# Altium PCB VibrationMonitorSPT.PcbDoc
Units mil, origin at the board's own origin, x right, y up, seen from the top; angles counter-clockwise.
Board outline 2130 x 1361 mil, 2 copper layers (Top Layer, Bottom Layer); 37 components, 30 nets, 168 pads, 22 vias.
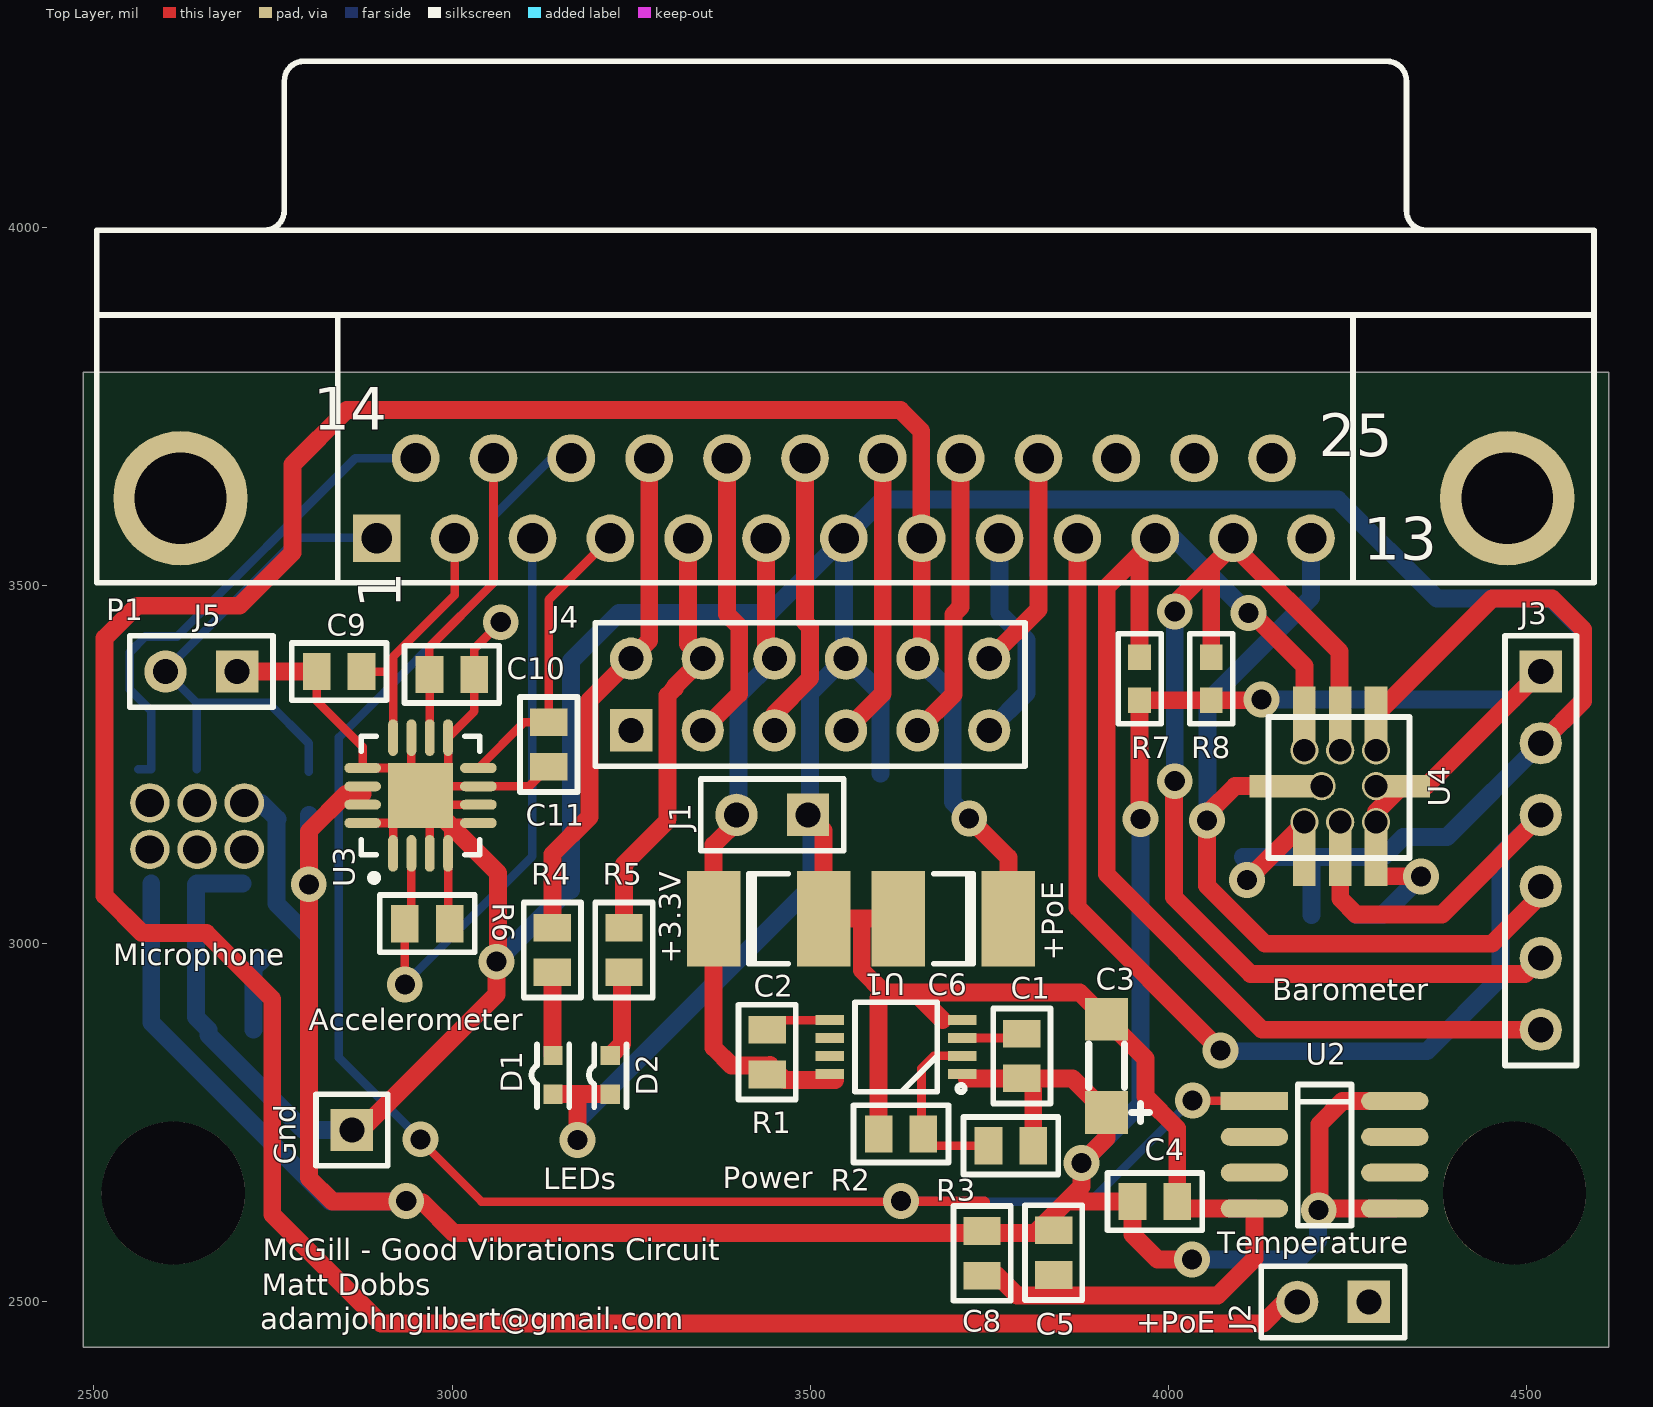
[diagram p0: Top Layer view]
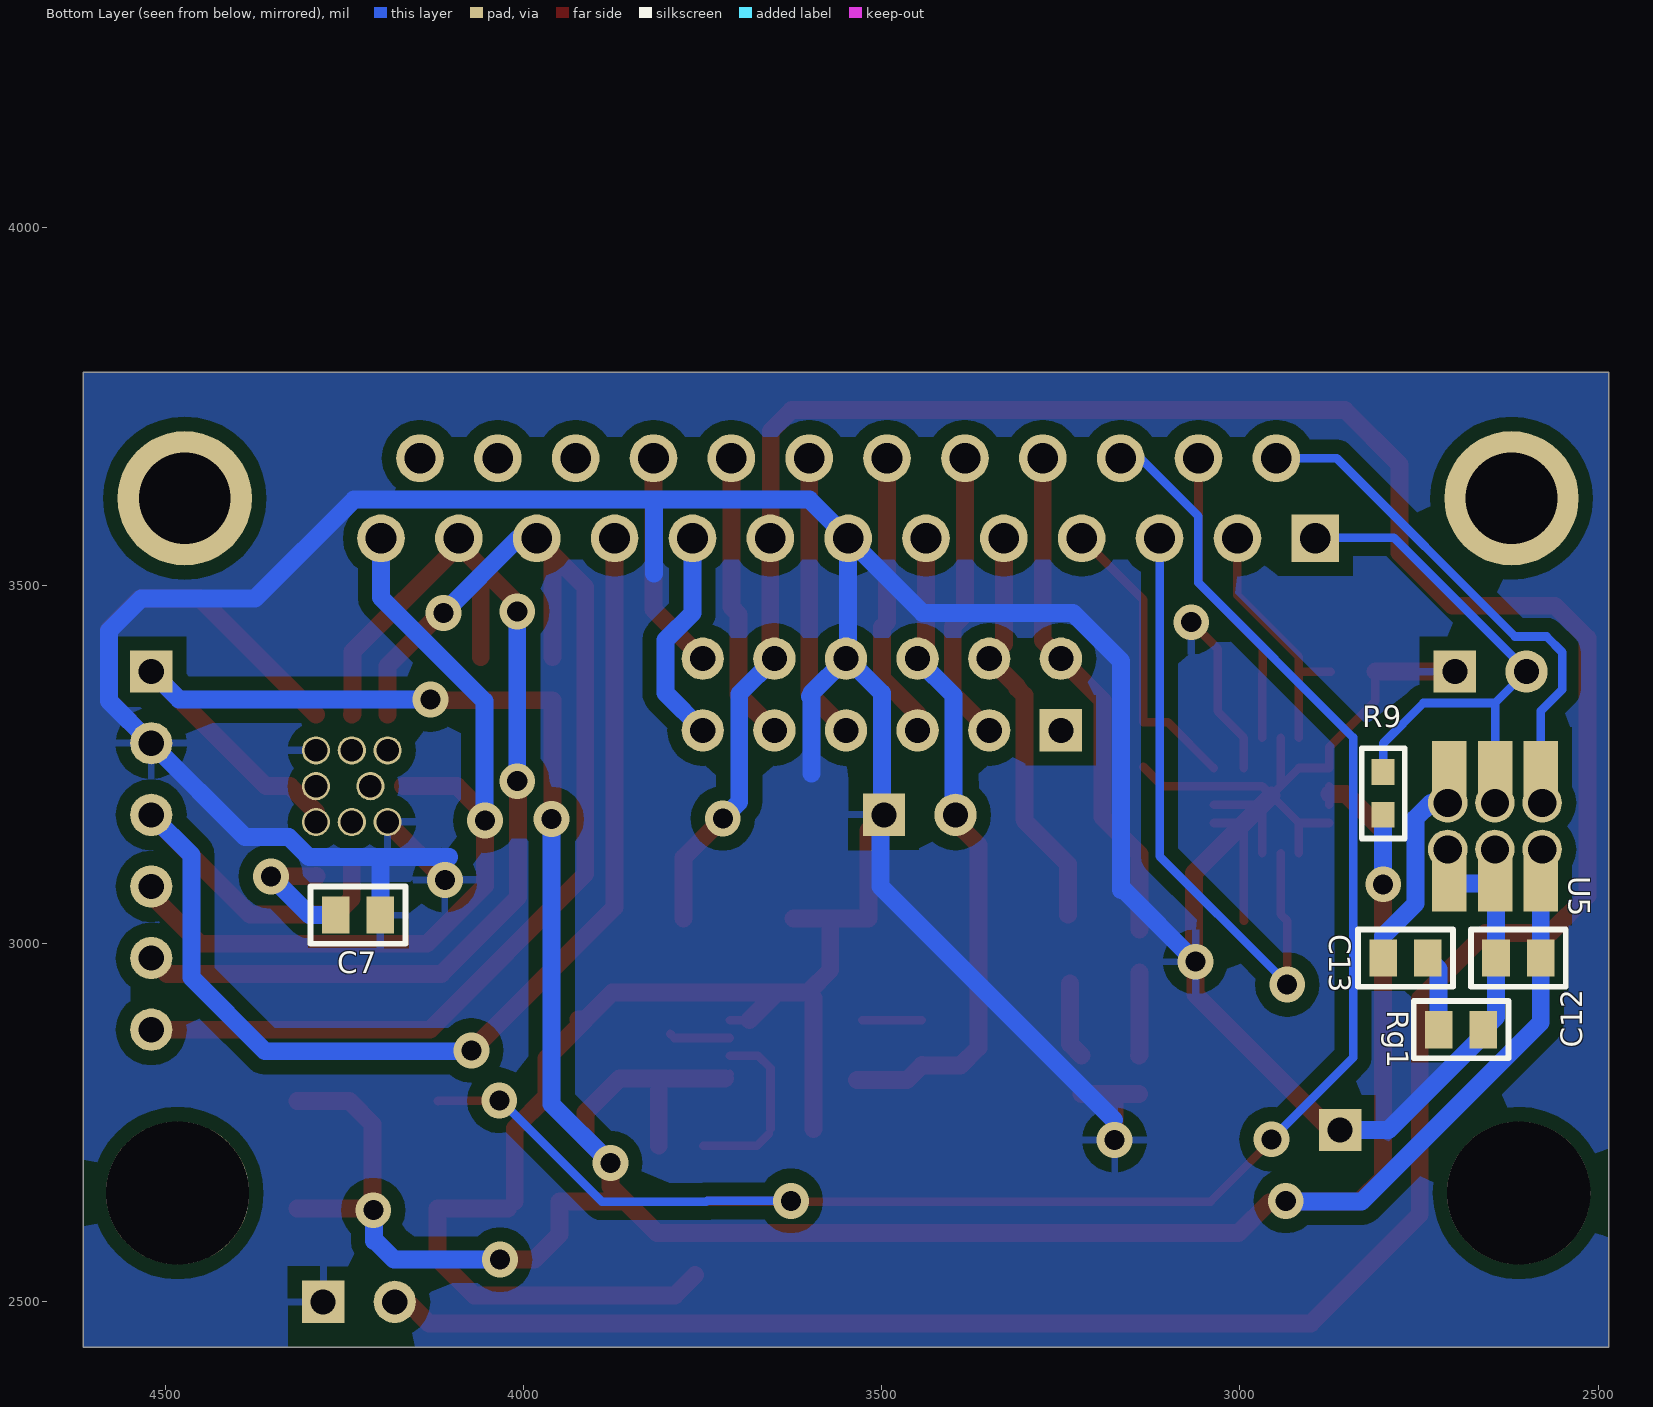
[diagram p1: Bottom Layer view, seen from below]

## Layer stack, top to bottom
Top Layer: signal copper 1.4
Dielectric: dielectric 12.6, FR-4, Dk 4.8
Bottom Layer: signal copper 1.4

## Board outline
2485,3798 4615,3798 4615,2437 2485,2437 2485,3798

## Design rules (kind name [scope] priority, off if disabled: settings)
Clearance Clearance_1 [(IsRegion)] p1: gap=20
Clearance [All] p2: gap=5
HoleSize [All] p1: absolutevalues=TRUE maxlimit=1000 minlimit=1 maxpercent=80.000 minpercent=20.000
MinimumSolderMaskSliver [All] p1: minsoldermaskwidth=0
PolygonConnect [All] p1: connectstyle=Relief reliefconductorwidth=10 reliefentries=4 polygonreliefangle="90 Angle"
RoomDefinition VibrationMonitorSPT [InComponentClass('VibrationMonitorSPT')] p1: confinementstyle=ConfineIn formatcopy=TRUE lockcomponents=FALSE outline 2402,2370 4682,2370 4682,4321 2402,4321
RoomDefinition P1 [InComponentClass('P1')] p2: confinementstyle=ConfineIn formatcopy=TRUE lockcomponents=FALSE outline 3313,2680 3989,2680 3989,3116 3313,3116
RoutingVias [All] p1: holewidth=28 width=50 viastyle="Through Hole" minholewidth=28 minwidth=50 maxholewidth=28 maxwidth=50
SilkToSilkClearance [All] p1: silktosilkclearance=0
SilkscreenOverComponentPads [All] p1: minsilkscreentomaskgap=0
SolderMaskExpansion [All] p1: expansion=4
Width [All] p1: maxlimit=100 minlimit=12 preferedwidth=12
24 further rules are at their usual default settings.

## Classes and differential pairs
component class VibrationMonitorSPT: C4 C5 C6 C7 C8 C9 C10 C11 C12 C13 D1 D2 Gnd J1 J2 J3 J4 J5 P1 R3 R4 R5 R6 R7 R8 R9 Rg1 U2 U3 U4 U5
component class P1: C1 C2 C3 R1 R2 U1

## Components (designator, comment, footprint, x,y, rotation, side; value= is the part's Value field where it differs from the comment)
C1 "0.1uF" 0805 3795.48,2874.48 r270 top
C2 "33uF x 16V" CC4532-1812 3442,3035 r0 top
C3 "10u A3216 10V LO ESR" TANTA 3914,2765 r90 top
C4 "0.1uF" 0805 3950,2640 r0 top
C5 "10uF" 0805 3840,2600 r270 top
C6 "33uF x 16V" CC4532-1812 3700,3035 r180 top
C7 "0.1uF" 0805 4200,3040 r0 bottom
C8 "0.1uF" 0805 3740,2599 r270 top
C9 "4.7nF" 0805 2811,3380 r0 top
C10 "4.7nF" 0805 3031,3376 r180 top
C11 "4.7nF" 0805 3135,3247 r90 top
C12 "0.1uF" 0805 2580,2980 r0 bottom
C13 "10uF" 0805 2800,2980 r180 bottom
D1 "LTST-S270KSKT, Yellow" LED-S270KGKT 3141,2790 r90 top
D2 "LTST-S270KSKT, Yellow" LED-S270KGKT 3221,2790 r90 top
Gnd "Header1" HDR1 2860,2740 r90 top
J1 "Header2" HDR1X2 3497,3180 r180 top
J2 "Header2" HDR1X2 4280,2500 r180 top
J3 "Header 6" HDR1X6 4520,3380 r270 top
J4 "6x2 header" HDR2X6 3250,3298 r0 top
J5 "Header2" HDR1X2 2700,3380 r180 top
P1 "CONN, DB25f R/A, 0.318\"" DSUB1.385-2H25A 3547,3996 r0 top
R1 "Res0805" 0805 3440,2880 r270 top
R2 "Res0805" 0805 3595.48,2734.48 r0 top
R3 "Res0603" 0805 3749,2718 r0 top
R4 "Res0805" 0805 3140,2960 r90 top
R5 "Res0805" 0805 3240,2960 r90 top
R6 "Res0805" 0805 2934,3028 r0 top
R7 "Res0805" 0603 3960,3340 r90 top
R8 "Res0805" 0603 4060,3340 r90 top
R9 "Res0805" 0603 2800,3180 r90 bottom
Rg1 "Res0805" 0805 2660,2880 r0 bottom
U1 "LT1962EMS8" MSOP-8 3712.48,2818.48 r180 top
U2 "TMP36FS - TempSensor" SO8/L200 4120,2780 r270 top
U3 "ADXL335BCPZ. - Accelerometer" ADXL335 2956,3207 r90 top
U4 "BMP085 - Pressure Sensor" BMP085 4140,3120 r90 top
U5 "SPM0407HE3H-SB - Microphone" SPM0407HE3H-SB 2580,3240 r270 bottom

## Footprints (in the part's own frame and the unit in brackets; to place one, negate y for a bottom-side part, rotate by r counter-clockwise, add the part's x,y. Pads: shape width x height; smd on the part's side, far side on the other; paste and mask are expansions set on the pad)
0603 [mil]
  rect 36x32 smd: 1(0,0) 2(60,0)
  silkscreen extent -33,-30 93,30
0805 [mil]
  rect 38.5x52 smd: 1(0,0) 2(62.5,0)
  silkscreen extent -35,-40 98,40
ADXL335 [mm] "QFN, 16-Leads, Body 4.2x4.2mm (max), Pitch 0.65mm, IPC Low Density"
  oval 1.3x0.35 smd: 1(-2.052,0.975) 2(-2.052,0.325) 3(-2.052,-0.325) 4(-2.052,-0.975) 9(2.052,-0.975) 10(2.052,-0.325) 11(2.052,0.325) 12(2.052,0.975)
  oval 0.35x1.3 smd: 5(-0.975,-2.052) 6(-0.325,-2.052) 7(0.325,-2.052) 8(0.975,-2.052) 13(0.975,2.052) 14(0.325,2.052) 15(-0.325,2.052) 16(-0.975,2.052)
  rect 2.3x2.3 smd: 17(0,0)
  silkscreen extent -3.04,-2.1 2.1,2.1
BMP085 [mm] "Pressure sensor"
  rect 2x0.8 smd: 1(0,-1.27) 2(0,-2.54) 3(-0.007,-3.81) 5(5.08,-3.81) 6(5.08,-2.54) 7(5.08,-1.27)
  round 1 hole 0.8: 1(1.27,-1.27) 2(1.27,-2.54) 3(1.27,-3.81) 4(2.54,-3.81) 5(3.81,-3.81) 6(3.81,-2.54) 7(3.81,-1.27) 8(2.54,-1.88)
  round 0.5 on Top Overlay: 2(-0.737,-0.229)
  rect 0.8x2 smd: 4(2.54,-4.729)
  rect 0.8x2.8 smd: 8(2.54,-0.729)
  silkscreen extent -0.01,-5 4.99,0
CC4532-1812 [mm]
  rect 1.9x3.4 smd: 1(-1.95,0) 2(1.95,0)
  silkscreen extent -0.7,-1.6 0.7,1.6
DSUB1.385-2H25A [mm] "Connector; D Subminiature; 25 Position; Right Angle; Pitch 1.385 mm"
  rect 1.69x1.69 hole 1.09: 1(-16.566,-10.92)
  round 1.69 hole 1.09: 2(-13.805,-10.92) 3(-11.044,-10.92) 4(-8.283,-10.92) 5(-5.522,-10.92) 6(-2.761,-10.92) 7(0,-10.92) 8(2.761,-10.92) 9(5.522,-10.92) 10(8.283,-10.92) 11(11.044,-10.92) 12(13.805,-10.92) 13(16.566,-10.92) 14(-15.185,-8.08) 15(-12.424,-8.08) 16(-9.663,-8.08) 17(-6.902,-8.08) 18(-4.141,-8.08) 19(-1.38,-8.08) 20(1.381,-8.08) 21(4.142,-8.08) 22(6.903,-8.08) 23(9.664,-8.08) 24(12.425,-8.08) 25(15.186,-8.08)
  round 4.76 hole 3.26: 26(-23.526,-9.5) 27(23.526,-9.5)
  silkscreen extent -26.5,-12.5 26.6,6
HDR1 [mm]
  rect 1.5x1.5 hole 0.889: 1(0,0)
  silkscreen extent -1.27,-1.27 1.27,1.27
HDR1X2 [mm]
  rect 1.5x1.5 hole 0.889: 1(0,0)
  round 1.5 hole 0.889: 2(2.54,0)
  silkscreen extent -1.27,-1.27 3.81,1.27
HDR1X6 [mm]
  rect 1.5x1.5 hole 0.889: 1(0,0)
  round 1.5 hole 0.889: 2(2.54,0) 3(5.08,0) 4(7.62,0) 5(10.16,0) 6(12.7,0)
  silkscreen extent -1.27,-1.27 13.97,1.27
HDR2X6 [mm]
  rect 1.5x1.5 hole 0.889: 1(0,0)
  round 1.5 hole 0.889: 2(2.54,0) 3(5.08,0) 4(7.62,0) 5(10.16,0) 6(12.7,0) 7(12.7,2.54) 8(10.16,2.54) 9(7.62,2.54) 10(5.08,2.54) 11(2.54,2.54) 12(0,2.54)
  silkscreen extent -1.27,-1.27 13.97,3.81
LED-S270KGKT [mil]
  rect 27x27 smd: 1(54,0) 2(0,0)
  silkscreen extent -18,-22 70,30
MSOP-8 [mil]
  rect 40x14 smd: 1(0,0) 2(0,-25) 3(0,-50) 4(0,-75) 5(185,-75) 6(185,-50) 7(185,-25) 8(185,0)
  silkscreen extent -3,-100 150,26
SO8/L200 [mil]
  rect 25x94 smd: 1(-0.4,0.18)
  oval 25x94 smd: 2(49.6,0.18) 3(99.6,0.18) 4(149.6,0.18) 5(149.6,196.18) 6(99.6,196.18) 7(49.6,196.18) 8(-0.4,196.18)
  silkscreen extent -23,61 174,136
SPM0407HE3H-SB [mm]
  rect 2x1.22 smd: 1(-0.1,0) 2(-0.1,-1.62) 3(-0.1,-3.24) 4(3.956,-3.24) 5(3.956,-1.62) 6(3.956,0)
  round 1.4 hole 1: 1(1.1,0.05) 2(1.1,-1.625) 3(1.1,-3.3) 4(2.75,-3.3) 5(2.75,-1.625) 6(2.75,0.05)
  round 0.5 on Bottom Overlay: 2(-1.53,1.12)
TANTA [mil]
  rect 60x60 smd: 1(-0.4,0.18) 2(129.6,0.18)
  silkscreen extent -13,-60 95,25

## Part data
C1 C4 C5 C7 C8 C9 C10 C11 C12 C13: library part Cap0603, "Capacitor, Ceramic, 0603"
C2 C6: library part "Cap Pol3", "CAP POL C4532X5R1C336M"
C3: library part CAP_POL
D1 D2: library part LED, "LED Side View Yellow 0603"
Gnd: "TestPoint1"
J3: "Header, 0.1\" 6-Pin straight"
J4: library part Header6x2
P1: library part "D Connector 25", "Amp 5747846-4 or ITT DBMG25SJA197"
R1 R2 R4 R5 R6 R7 R8 R9 Rg1: library part Res0603, "Resistor"
R3: "Resistor"
U1: "micropower, low noise, low  dropout regulator"
U2: library part TMP36FS
U3: library part ADXL335
U4: library part BMP085
U5: library part SPM0407HE3H-SB

## Free pads (board coordinates)
  round 200 hole 200: 0(2610.78,2652) 0(4483.22,2652)
  round 450 on Bottom Overlay paste+0: 1(3547,2892)

## Via types
v1: diameter 50, hole 28, Top Layer to Bottom Layer, 22 vias

## Nets (pads, with @x,y where several pads share a name; then routed paths per layer and width w, separated by ;. In a path a pad name is that pad's centre, name@x,y a point inside that pad or via, vN(x,y) a via of type N, cw(c..) or ccw(c..) an arc to the next point about the centre after c; other vN are vias at no path point)
2V8: C1.2 C3.1 C4.1 C5.1 C7.2 C8.1 C12.1 J3.1 R3.2 R7.1 R8.1 R9.1 U1.1 U2.5 U2.8 U3.14 U3.15 U4.3 U4.4 U5.6 | length 5457.2
  Top Layer w12: U3.15 2875.21,3209 U3.14 ; U1.1 U1.1@3718.98,2811.98 ; C1.2 C1.2@3811.5,2795.95
  Top Layer w25: 2875.21,3209 2852,3209 2800,3157 v1(2800,3083) 2792.97,3075.97 2800,3068.94 2800,2673 2833,2640 v1@2922,2640 ; v1@2959,2639 3002,2596 3814,2596 3858,2640 ; U1.1@3718.98,2811.98 C1.2 3866.44,2811.98 C3.1 3913.82,2728.82 v1(3879,2694) 3879,2661 3858,2640 ; R3.2 C1.2@3811.5,2795.95 ; v1@3960,3174 R7.1 R8.1 4129,3340 v1(4130,3341) ; v1(4033,2559) 3985,2559 3950,2594 C4.1 3858,2640 ; v1@4209.4,2630.4 U2.5 ; v1@4211,2632 4211,2748 4243.4,2780.4 U2.8 ; U4.3@4289,3094.74 4289.71,3094.73 v1(4353,3094) ; U4.3@4290,3170 4290,3183.83 4326.17,3220 4360,3220 J3.1
  Bottom Layer w25: U5.6@2580,3084.25 C12.1 2580,2890 2830,2640 v1@2922,2640 ; v1(2800,3083) R9.1 ; v1(3879,2694) 3961,2776 v1(3961,3174) ; v1(4033,2559) 4181,2559 4207,2585 4209,2585 4209,2627 v1(4210,2628) ; v1(4130,3341) 4481,3341 J3.1 ; C7.2 4299,3040 v1(4353,3094)
  other v1: 2936,2641
3V3: C2.1 J1.2 J4.10 P1.6 R1.2 U1.8 | length 948.9
  Top Layer w25: J1.2@3402,3175 3365.23,3138.23 C2.1 3365.23,2854.77 3390,2830 3443.5,2830 3444,2830.5 3464.5,2810 3535,2810 ; P1.6@3444,3560.38 P1.6 3438.3,3409.7 J4.10
  Bottom Layer w25: J1.2@3400,3175 3400,3347 3450,3397 J4.10
ACCTEST: P1.3 R6.1 U3.2 | length 894.4
  Top Layer w12: v1(2934,2943) 2934,2959 2936,2961 2934,2963 2934,3032 2943.2,3041.2 U3.2
  Bottom Layer w12: v1(2934,2943) 2934,2959 2949,2959 3112.2,3122.2 P1.3
ACCXOUT: C9.2 P1.2 U3.12 | length 358.6
  Top Layer w12: C9.2 2916.61,3380 2917.61,3379 ; U3.12 2917.61,3379 ; P1.2@3003.61,3565.96 P1.2 3003.5,3486.5 2917.61,3400.61 2917.61,3379
ACCYOUT: C10.2 P1.15 U3.10 | length 432.4
  Top Layer w12: U3.10 2968.8,3375.7 C10.2 2968,3376.5 2968,3414 3057.85,3503.85 P1.15 P1.15@3054.5,3674.54
ACCZOUT: C11.2 P1.4 U3.8 | length 417.1
  Top Layer w12: U3.8 3100.9,3309.5 C11.2 3135,3480.18 P1.4 P1.4@3221,3565.98
GND: C2.2 C3.2 C4.2 C5.2 C6.2 C7.1 C8.2 C9.1 C10.1 C11.1 C12.2 D1.2 D2.2 Gnd.1 J1.1 J2.1 J3.2 J4.9 J5.1 P1.7 R2.1 R6.2 Rg1.1 U1.4 U2.4 U3.1 U3.3 U3.4 U3.5 U3.6 U3.7 U3.9 U3.11 U3.13 U3.16 U3.17 U4.1 U4.5 U5.4 U5.5 | length 9325
  Top Layer w12: C9.1 2811,3339 2875.21,3274.79 U3.13 2917.61,3245.39 U3.17 ; U3.16 U3.17@2917.61,3168.61 ; U3.1 U3.17@2917.61,3168.61 ; U3.11 2943.2,3219.8 U3.17 ; U3.3 U3.17@2968.8,3194.2 ; R6.2@2994,3032 2994.39,3032.39 U3.4 U3.17@2994.39,3168.61 ; U3.17@2994.39,3245.39 U3.9 3031,3324.4 C10.1 3031,3412 v1(3068,3449) ; U3.5 U3.17@2994.39,3168.61 ; U3.6 U3.17@2968.8,3194.2 ; C11.1 3107.8,3219.8 U3.7 2968.8,3219.8 U3.17 ; 3595.48,2924.48 3603,2932 ; 3684.52,2893.48 U1.4 ; C4.2 C4.2@4022.1,2630.4 ; U3.17@2917.61,3168.61 U3.17 ; U3.17 U3.17@2994.39,3168.61 ; U3.17 U3.17@2968.8,3194.2
  Top Layer w25: J5.1 C9.1 ; Gnd.1 2873,2740 3062,2929 v1(3062,2975) ; U3.17 3064,3099 v1@3064,2975 ; D1.2 3179,2790 ; v1(3175,2726) 3175,2786 3179,2790 ; D2.2 3179,2790 ; J1.1@3502,3175 3518.77,3158.23 C2.2 3572,3035 ; P1.7@3544,3563.08 P1.7 ; J4.9@3547,3401 J4.9 ; R2.1@3595.48,2741.48 3595.48,2924.48 ; C6.2 3572,3035 ; 3684.52,2893.48 3646,2932 ; C8.2@3760.5,2537.5 3789,2509 4069,2509 4120.18,2560.18 U2.4 C4.2@4022.1,2630.4 ; C3.2@3923.4,2894.6 C3.2 ; C4.2 4012.5,2742.4 3968,2786.9 3968,2840 3913.82,2894.18 C3.2 ; v1(4110,3089) 4190,3169 U4.1@4190,3170 ; U4.5@4290,3320 4452,3482 4536,3482 4579,3439 4579,3339 J3.2 ; 3572,3035 3572,2963 3603,2932 3646,2932 ; 3646,2932 3876.42,2932 C3.2
  Bottom Layer w12: U5.5@2642.5,3082.97 U5.5@2643.78,3084.25
  Bottom Layer w25: U5.5@2642.5,3082.97 C12.2 2642.5,2897.5 Rg1.1 2660,2872.5 2792.5,2740 Gnd.1 ; U5.5@2643.78,3084.25 U5.4@2707.56,3084.25 ; v1@3062,2962 v1(3062,2975) 3162,3075 3166,3075 3166,3395 3233,3462 3442.92,3462 P1.7 ; v1(3175,2726) v1@3177,2724 ; 3176,2754 3502,3080 J1.1@3502,3175 ; J1.1@3500,3175 3500,3350 J4.9@3549,3399 ; 3598,3238 3598,3347 ; 3600,3345 3598,3347 ; 3818,3517 3818,3620 3600.92,3620 P1.7 ; 3819,3620 4237,3620 4375,3482 4534,3482 4579,3437 4579,3339 J3.2 4389,3149 4328,3149 4300,3121 4203,3121 ; v1(4110,3089) 4110,3115 4104,3121 4203,3121 ; C7.1 4200,3118 4203,3121 ; P1.7 3547,3401 J4.9@3549,3399 ; J4.9@3549,3399 J4.9 3598,3350 3598,3347
LEDGREEN: J4.12 P1.17 R4.2 | length 713.9
  Top Layer w25: R4.2@3140,3020 3140,3125 3192,3177 3192,3340 J4.12 3275.25,3423.25 P1.17
LEDRED: J4.11 P1.5 R5.2 | length 579.5
  Top Layer w25: R5.2@3240,3040.57 3240,3111 3300,3171 3300,3173 3301,3174 3301,3347 3311,3357 3311,3359 J4.11 3329.6,3418.4 P1.5
MICGAINSELECT: J5.2 P1.1 R9.2 U5.2@2643.78,3243.94 U5.2@2643.98,3196.69 | length 747.5
  Bottom Layer w12: U5.2@2643.78,3243.94 2643.78,3336.22 ; R9.2 2800,3280 2743.78,3336.22 2643.78,3336.22 ; P1.1 2893.87,3567 2785,3567 2600,3382 J5.2 2643.78,3336.22
MICOUT: P1.14 U5.1 | length 704.8
  Bottom Layer w12: U5.1@2562.06,3243.94 2580,3243.94 2580,3325 2550,3355 2550,3407 2572,3429 2616,3429 2864.89,3677.89 P1.14
NetC1_1: C1.1 U1.3 | length 85.5
  Top Layer w12: U1.3 3789.48,2868.48 C1.1
NetC13_1: C13.1 U5.3 | length 268.5
  Bottom Layer w25: U5.3@2709.92,3196.69 2733.31,3196.69 2756,3174 2755,3173 2755,3056 2800,3011 C13.1
NetC13_2: C13.2 Rg1.2 | length 106.2
  Bottom Layer w25: Rg1.2 2722.5,2965 C13.2
NetD1_1: D1.1 R4.1 | length 116.4
  Top Layer w25: R4.1 3140,2845 D1.1
NetD2_1: D2.1 R5.1 | length 107.1
  Top Layer w25: D2.1 3237,2860 R5.1@3237,2944.43
NetR1_1: R1.1 U1.5 | length 83.7
  Top Layer w12: R1.1@3444,2893 3444.48,2893.48 U1.5
NetR2_2: R2.2 R3.1 U1.2 | length 246.9
  Top Layer w12: R2.2@3655.48,2741.48 3655.48,2826.48 3672.48,2843.48 U1.2 ; R2.2 3674.45,2718 R3.1
POE: C6.1 J2.2 J4.8 P1.8 | length 4552.9
  Top Layer w25: J4.8 3655.7,3403.7 P1.8 3655,3566.78 3655,3716 3626,3745 2853,3745 2777,3669 2777,3546 2703,3472 2560,3472 2515,3427 2515,3067 2567,3015 2656.91,3015 2749,2922.91 2749,2622 2901,2470 4132,2470 4162,2500 J2.2 ; v1(3722,3175) 3776.77,3120.23 C6.1
  Bottom Layer w25: J4.8 3699,3349 3699,3198 v1(3722,3175)
PSEOC: J3.3 P1.10 U4.2@4240,3120 U4.2@4240,3170 | length 1886.4
  Top Layer w25: P1.10 3873.1,3050.9 v1(4073,2851) ; U4.2@4240,3120 4240,3063 4262,3041 4382,3041 4520,3179 J3.3
  Bottom Layer w25: v1(4073,2851) 4074,2850 4361,2850 4464,2953 4464,3124 J3.3
PSSCL: J3.5 P1.12 R8.2 U4.6 | length 1515.7
  Top Layer w25: v1@4008,3227 4008,3065 4115,2958 4498,2958 J3.5 ; v1@4009,3473 4009,3475 4060,3526 ; R8.2 4060,3526 ; P1.12 P1.12@4090.5,3556.5 ; U4.6@4240,3320 4239,3321 4239,3408 P1.12@4090.5,3556.5 ; 4060,3525.99 P1.12@4090.5,3556.5
  Bottom Layer w25: v1(4009,3227) v1(4009,3464)
PSSDA: J3.6 P1.11 R7.2 U4.7 | length 1716.9
  Top Layer w25: R7.2 3960,3544.28 P1.11 3914,3498.28 3914,3097 4131,2880 J3.6 ; v1@4114,3464 4190,3388 U4.7@4190,3320
  Bottom Layer w25: P1.11 4007.92,3566.08 v1(4112,3462)
PSXCLR: J3.4 P1.13 U4.8 | length 1225.4
  Top Layer w25: U4.8@4168.69,3220 4093,3220 4054,3181 4054,3081 4135,3000 4452,3000 4520,3068 J3.4
  Bottom Layer w25: v1(4054,3172) 4055,3172 4055,3339 4199.2,3483.2 P1.13
SPARE1: J4.2 P1.18 | length 408.1
  Top Layer w25: J4.2 3401,3349 3401,3443 3383.95,3460.05 P1.18
SPARE2: J4.3 P1.19 | length 403.6
  Top Layer w25: J4.3 3450,3321 3500,3371 3500,3442 3492.65,3449.35 P1.19
SPARE3: J4.4 P1.20 | length 401.2
  Top Layer w25: J4.4 3601.35,3349.35 P1.20
SPARE4: J4.5 P1.21 | length 404.8
  Top Layer w25: J4.5 3700,3348 3700,3460 3710.05,3470.05 P1.21
SPARE5: J4.6 P1.9 | length 305.2
  Bottom Layer w25: J4.6 3802,3350 3802,3424 3764.4,3461.6 P1.9
SPARE6: J4.7 P1.22 | length 317.3
  Top Layer w25: J4.7 3818.75,3466.75 P1.22 ; P1.22@3820,3676.64 P1.22 ; P1.22@3825.92,3677.89 P1.22
TEMPOUT: P1.16 U2.1 | length 2682.1
  Top Layer w12: v1(2956,2727) 2956,2729.5 2953.75,2727.25 3041,2640 3745,2640 3744,2641 v1(3627,2641) ; v1(4034,2781) 4119.58,2781 U2.1
  Bottom Layer w12: v1(2956,2727) 2956,2729.5 2954.75,2728.25 2842,2841 2842,3288 3058,3504 3058,3597 3138.89,3677.89 P1.16 ; v1(3627,2641) 3744,2641 3745,2640 3891,2640 4039,2788 4043,2788 4036,2781 v1(4034,2781)
  Bottom Layer w25: P1.16@3166.55,3674.55 P1.16
pads on no net: J4.1 P1.23 P1.24 P1.25 P1.26 P1.27 U1.6 U1.7 U2.2 U2.3 U2.6 U2.7 U4.2@4149,3091 U5.2@2535.91,3300.24

## Polygon pours and split planes (outlines as drawn)
GND on Bottom Layer "TopOverlay-No Net" (solid, remove dead copper): 4615,3798 4615,2437 2485,2437 2485,3798

## Silkscreen, mask and mechanical layers (free items; w line width, h text height)
Top Overlay:
  text "+PoE" at 3853,2976 h30 r90
  text "+3.3V" at 3319,2972 h30 r90
  text "Microphone" at 2527,2970 h30
  text "Barometer" at 4145,2921 h30
  text "Accelerometer" at 2800,2879 h30
  text "Power" at 3378,2659 h30
  text "LEDs" at 3127,2657 h30
  text "Temperature" at 4068,2568 h30
  text "McGill - Good Vibrations Circuit" at 2736,2558 h30
  text "Matt Dobbs" at 2734,2509 h30
  text "adamjohngilbert@gmail.com" at 2732,2462 h30
  text "+PoE" at 3955,2457 h30

## Text inside footprints (layer, text, board x,y; h text height)
P1: Top Overlay "1" at 2928,3468 h59.06 r90; Top Overlay "13" at 4272,3536 h59.06; Top Overlay "14" at 2806,3718 h59.06; Top Overlay "25" at 4210,3681 h59.06